# Altium PCB PCB_X_battery.PcbDoc
Units mm, origin at the board's own origin, x right, y up, seen from the top; angles counter-clockwise.
Board outline 35.05 x 27.18 mm, 2 copper layers (Top Layer, Bottom Layer); 23 components, 11 nets, 75 pads, 27 vias.
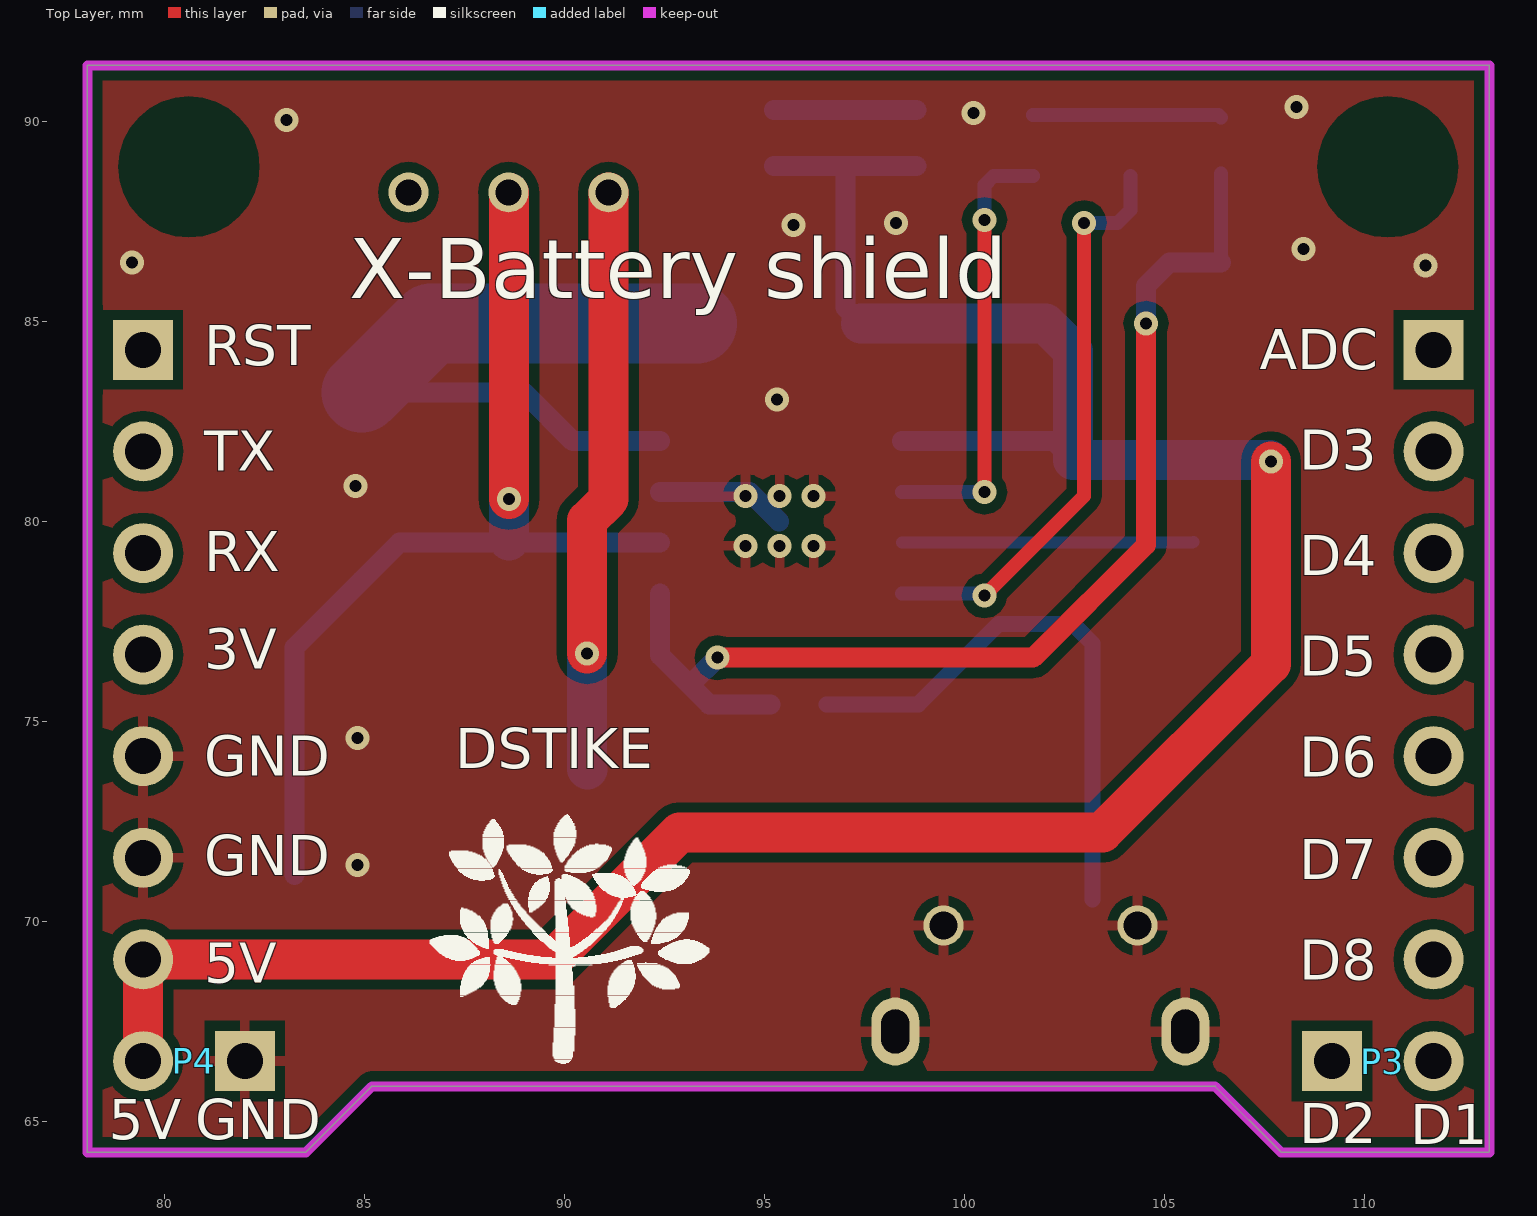
[diagram p0: Top Layer view]
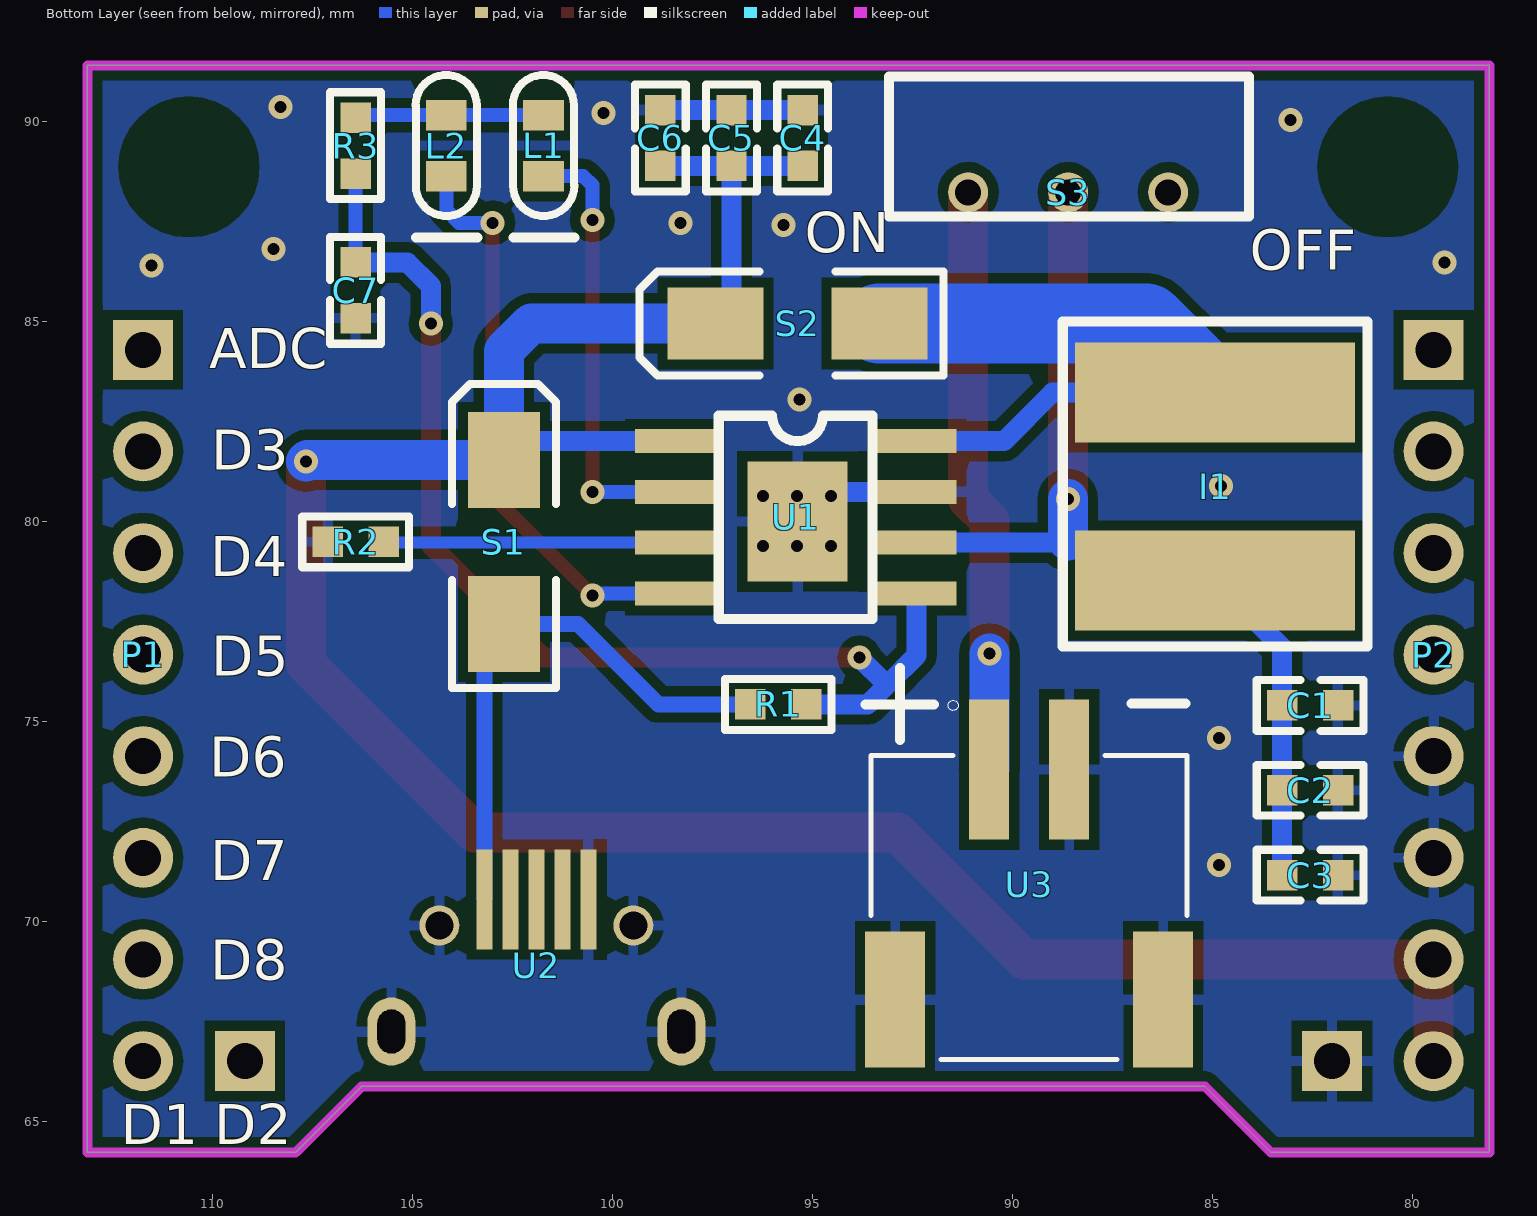
[diagram p1: Bottom Layer view, seen from below]

## Layer stack, top to bottom
Top Solder: solder mask 0.0102, Solder Resist, Dk 3.5
Top Layer: signal copper 0.0356
Dielectric 1: dielectric 0.32, FR-4, Dk 4.8
Bottom Layer: signal copper 0.0356
Bottom Solder: solder mask 0.0102, Solder Resist, Dk 3.5

## Board outline
78.08,64.237 78.08,91.415 113.132,91.415 113.132,64.237 107.925,64.237 106.274,65.888 85.192,65.888 83.541,64.237

## Design rules (kind name [scope] priority, off if disabled: settings)
Clearance [All] p1: gap=0.254
PolygonConnect [All] p1: connectstyle=Relief reliefconductorwidth=0.254 reliefentries=4 polygonreliefangle="90 Angle" airgapwidth=0.254
RoutingVias [All] p1: holewidth=0.3 width=0.6 viastyle="Through Hole" minholewidth=0.3 minwidth=0.6 maxholewidth=0.3 maxwidth=0.6
SolderMaskExpansion [All] p1: expansion=0.102
Width [All] p1: maxlimit=7 minlimit=0.254 preferedwidth=0.254
30 further rules are at their usual default settings.

## Components (designator, comment, footprint, x,y, rotation, side; value= is the part's Value field where it differs from the comment)
C1 "0.1uF" C0603 81.839,75.59 r0 bottom
C2 "22uF" C0603 81.839,73.469 r0 bottom
C3 "22uF" C0603 81.839,71.349 r0 bottom
C4 "0.1uF" C0603 95.072,88.875 r90 bottom
C5 "22uF" C0603 96.85,88.875 r90 bottom
C6 "22uF" C0603 98.628,88.875 r90 bottom
C7 "10uF" C0603 106.604,86.512 r270 bottom
I1 "CD54" introductor_cd54 84.938,83.236 r270 bottom
L1 "RED" LED 101.727,89.408 r90 bottom
L2 "GREEN" LED 104.158,89.408 r90 bottom
P1 "Header 7" HDR1X7 111.735,84.303 r270 bottom
P2 "Header 7" HDR1X7 79.477,84.303 r270 bottom
P3 "Header 2" HDR1X2 109.195,66.523 r0 top
P4 "Header 2" HDR1X2 82.017,66.523 r180 top
R1 "0.3R" R0603 95.86,75.438 r0 bottom
R2 "0.68K" R0603 106.426,79.502 r0 bottom
R3 "1K" R0603 106.426,89.408 r270 bottom
S1 "SS34" Diode 102.718,79.502 r90 bottom
S2 "SS34" Diode 95.377,84.963 r0 bottom
S3 "Switch for shield" Switch_battery 91.11,88.265 r180 bottom
U1 "5V 1A" TP5410 95.195,79.985 r180 bottom
U2 "MicroUSB-5P" MICROUSB_5S 99.484,69.911 r0 bottom
U3 "S2B-PH-SM4-TB" S2B-PH-SM4-TB 89.459,70.256 r0 bottom

## Footprints (in the part's own frame and the unit in brackets; to place one, negate y for a bottom-side part, rotate by r counter-clockwise, add the part's x,y. Pads: shape width x height; smd on the part's side, far side on the other; paste and mask are expansions set on the pad)
C0603 [mil]
  rect 30x30 smd: 1(1,7) 2(56,7)
  silkscreen extent -24,-18 81,32
Diode [mm]
  rect 2.4x1.8 smd: 1(-2.05,0) 2(2.05,0)
  silkscreen extent -3.65,-1.3 3.95,1.3
HDR1X2 [mm] "Connector; Header; 2 Position"
  rect 1.5x1.5 hole 0.9: 1(0,0)
  round 1.5 hole 0.9: 2(2.54,0)
HDR1X7 [mm] "Connector; Header; 7 Position"
  rect 1.5x1.5 hole 0.9: 1(0,0)
  round 1.5 hole 0.9: 2(2.54,0) 3(5.08,0) 4(7.62,0) 5(10.16,0) 6(12.7,0) 7(15.24,0)
introductor_cd54 [mm]
  rect 2.5x7 smd: 1(0,0) 2(4.7,0)
  silkscreen extent -1.78,-3.81 6.35,3.81
LED [mil]
  rect 30x40 smd: 1(-30,0) 2(30,0)
  silkscreen extent -90,-30 70,30
MICROUSB_5S [mm]
  rect 0.4x2.5 smd: 1(3.721,-0.65) 2(3.071,-0.65) 3(2.421,-0.65) 4(1.771,-0.65) 5(1.121,-0.65)
  round 1 hole 0.7 unplated: 6(0,0) 7(4.85,0)
  oval 1.2x1.7 hole 0.7 slot 1.1 at 90 deg unplated: 8(-1.205,2.65) 9(6.045,2.65)
R0603 [mil]
  rect 30x30 smd: 1(-27.5,0) 2(27.5,0)
  silkscreen extent -52,-25 52,25
S2B-PH-SM4-TB [mm]
  rect 1x3.5 smd: 1(1.127,-3.556) 2(-0.873,-3.556)
  rect 1.5x3.4 smd: P1(3.477,2.194) P2(-3.223,2.194)
  silkscreen extent -3.82,-5.28 4.08,3.69
Switch_battery [mm]
  round 1 hole 0.65: 1(0,-0.025) 2(2.5,-0.025) 3(5,-0.025)
  silkscreen extent -1.98,-0.63 7.02,2.87
TP5410 [mm]
  rect 2x0.6 smd: 1(-3.25,2.036) 2(-3.25,0.766) 3(-3.25,-0.504) 4(-3.25,-1.774) 5(2.798,-1.774) 6(2.798,-0.504) 7(2.798,0.766) 8(2.798,2.036)
  rect 2.5x3 smd: 9(-0.182,0.025)
  silkscreen extent -2.15,-2.41 1.69,2.67

## Part data
C1 C2 C3 C4 C5 C6 C7: library part C0603, "贴片电容"
I1: library part Inductor_CD54, "大功率电感"
L1 L2: library part LED, "0603 led"
P1 P2: "Header, 7-Pin"
P3 P4: "Header, 2-Pin"
R1 R2 R3: library part R0603, "贴片电阻"
S1 S2: library part Diode, "大电流二极管"
S3: library part Switch_battery, "三脚开关"
U1: library part TP5410, "电源芯片"
U2: library part MicroUSB_5S, "Micro USB插脚"
U3: "贴片2.0mm底座"

## Free pads (board coordinates)
  round 3 on Keep-Out: ""(80.62,88.875) ""(110.592,88.875)

## Via types
v1: diameter 0.6, hole 0.3, Top Layer to Bottom Layer, tented both sides, 27 vias

## Nets (pads, with @x,y where several pads share a name; then routed paths per layer and width w, separated by ;. In a path a pad name is that pad's centre, name@x,y a point inside that pad or via, vN(x,y) a via of type N, cw(c..) or ccw(c..) an arc to the next point about the centre after c; other vN are vias at no path point)
BAT+: S3.1 U3.1 | length 14.7
  Top Layer w1: v1(90.576,76.708) 90.576,80.035 91.11,80.569 S3.1
  Bottom Layer w1: v1(90.576,76.708) 90.576,73.822 U3.1
GND: C1.1 C2.1 C3.1 C4.2 C5.2 C6.2 C7.2 P2.5 P2.6 P4.1 R2.2 U1.7 U1.9 U2.5 U2.6 U2.7 U2.8 U2.9 U3.2 U3.P1 U3.P2 | length 6.8
  Bottom Layer w0.5: U1.7 94.637,80.75 U1.9 ; C4.2 C5.2 C6.2
  other v1: 84.836,71.425 84.836,74.6 94.535,79.4 95.386,79.4 96.237,79.4 94.535,80.645 95.386,80.645 96.237,80.645 84.785,80.899 95.326,83.058 111.531,86.411 79.197,86.487 108.483,86.817 95.733,87.427 98.298,87.478 83.058,90.043 100.228,90.221 108.306,90.373
NetC1_2: C1.2 C2.2 C3.2 I1.2 S3.2 U1.6 | length 24.7
  Top Layer w0.5: S3.2 S3.2@88.621,88.229
  Top Layer w1: v1(88.621,80.569) S3.2@88.621,88.229
  Bottom Layer w0.5: C3.2 C2.2 C1.2 83.261,76.859 I1.2 85.882,79.48 88.671,79.48 ; 88.621,79.531 88.671,79.48 ; U1.6 88.671,79.48
  Bottom Layer w1: 88.621,79.531 v1(88.621,80.569)
NetC7_1: C7.1 R1.1 R3.2 U1.5 | length 28.5
  Top Layer w0.5: v1(93.828,76.606) 101.727,76.606 104.546,79.426 v1(104.546,84.963)
  Bottom Layer w0.35: C7.1 R3.2
  Bottom Layer w0.5: U1.5 92.397,76.665 93.104,75.959 ; v1(93.828,76.606) 93.18,75.959 93.104,75.959 ; R1.1 93.624,75.438 93.104,75.959 ; v1(104.546,84.963) 104.546,85.903 105.131,86.487 C7.1
NetI1_1: I1.1 S2.1 U1.8 | length 17.1
  Bottom Layer w0.5: I1.1 89.002,83.236 90.217,82.02 U1.8
  Bottom Layer w2: I1.1 86.665,84.963 S2.1
NetL1_1: L1.1 U1.2 | length 11
  Top Layer w0.35: v1(100.508,80.747) v1(100.508,87.554)
  Bottom Layer w0.35: U1.2 98.449,80.747 v1(100.508,80.747) ; v1(100.508,87.554) 100.508,88.417 100.736,88.646 L1.1
NetL1_2: L1.2 L2.2 R3.1 | length 4.7
  Bottom Layer w0.35: L1.2 L2.2 106.362,90.17 R3.1
NetL2_1: L2.1 U1.4 | length 14.6
  Top Layer w0.35: v1(100.508,78.156) 102.997,80.645 v1(102.997,87.478)
  Bottom Layer w0.35: U1.4 100.453,78.21 v1(100.508,78.156) ; v1(102.997,87.478) 103.835,87.478 104.158,87.801 L2.1
NetR2_1: R2.1 U1.3 | length 7.3
  Bottom Layer w0.3: U1.3 105.706,79.48 R2.1
VCC_5V: R1.2 S1.1 U2.1 | length 14.1
  Bottom Layer w0.4: R1.2 98.856,75.438 100.87,77.452 S1.1 103.205,76.965 U2.1
VCC_OUT: C4.1 C5.1 C6.1 P2.7 P4.2 S1.2 S2.2 U1.1 | length 64.2
  Top Layer w1: P4.2 P2.7 89.713,69.063 92.888,72.238 103.454,72.238 107.671,76.454 v1(107.671,81.509)
  Bottom Layer w0.5: C4.1 C5.1 ; S2.2 97.028,85.362 C5.1 ; U1.1 102.249,82.02 S1.2 ; C6.1 C5.1
  Bottom Layer w1: S2.2 102.032,84.963 102.718,84.277 S1.2 107.627,81.552 v1(107.671,81.509)
pads on no net: P1.1 P1.2 P1.3 P1.4 P1.5 P1.6 P1.7 P2.1 P2.2 P2.3 P2.4 P3.1 P3.2 S3.3 U2.2 U2.3 U2.4

## Polygon pours and split planes (outlines as drawn)
GND on Top Layer "Top Layer-No Net" (solid, remove dead copper, pour order 44): 77.241,92.456 77.419,92.634 115.189,92.634 115.189,62.128 114.808,61.747 76.581,61.747
GND on Bottom Layer "Top Layer-No Net" (solid, remove dead copper, pour order 48): 76.911,92.202 77.165,92.456 115.087,92.456 115.087,61.951 114.198,61.062 113.36,61.9 75.616,61.9

## Keep-outs
Keep-Out Layer:
  the board outline again, w0.254

## Silkscreen, mask and mechanical layers (free items; w line width, h text height)
Top Overlay:
  drawing of 1036 lines, arcs and shapes, not listed
  text "X-Battery shield" at 84.633,85.598 h1.5
  text "RST" at 81.001,83.922 h1
  text "ADC" at 107.391,83.82 h1
  text "D3" at 108.382,81.305 h1
  text "TX" at 81.001,81.28 h1
  text "RX" at 81.001,78.765 h1
  text "D4" at 108.382,78.664 h1
  text "3V" at 81.001,76.327 h1
  text "D5" at 108.382,76.149 h1
  text "DSTIKE" at 87.274,73.838 h1
  text "GND" at 81.001,73.66 h1
  text "D6" at 108.382,73.635 h1
  text "GND" at 81.001,71.171 h1
  text "D7" at 108.382,71.069 h1
  text "D8" at 108.382,68.555 h1
  text "5V" at 81.001,68.478 h1
  text "5V" at 78.613,64.567 h1
  text "GND" at 80.772,64.567 h1
  text "D2" at 108.382,64.465 h1
  text "D1" at 111.15,64.44 h1
Bottom Overlay:
  lines w0.254: 85.674,75.463 87.02,75.463 ; 91.973,75.438 93.675,75.438 ; 92.812,74.549 92.812,76.352
  text "ON" at 95.199,86.741 h1
  text "OFF" at 84.074,86.309 h1
  text "ADC" at 110.084,83.845 h1
  text "D3" at 110.033,81.305 h1
  text "D4" at 110.058,78.638 h1
  text "D5" at 110.033,76.149 h1
  text "D6" at 110.084,73.635 h1
  text "D7" at 110.058,71.044 h1
  text "D8" at 110.058,68.555 h1
  text "D2" at 109.957,64.44 h1
  text "D1" at 112.293,64.44 h1